# EAGLE board sensor LF (tugas nanang) (EAGLE 7.5.0)
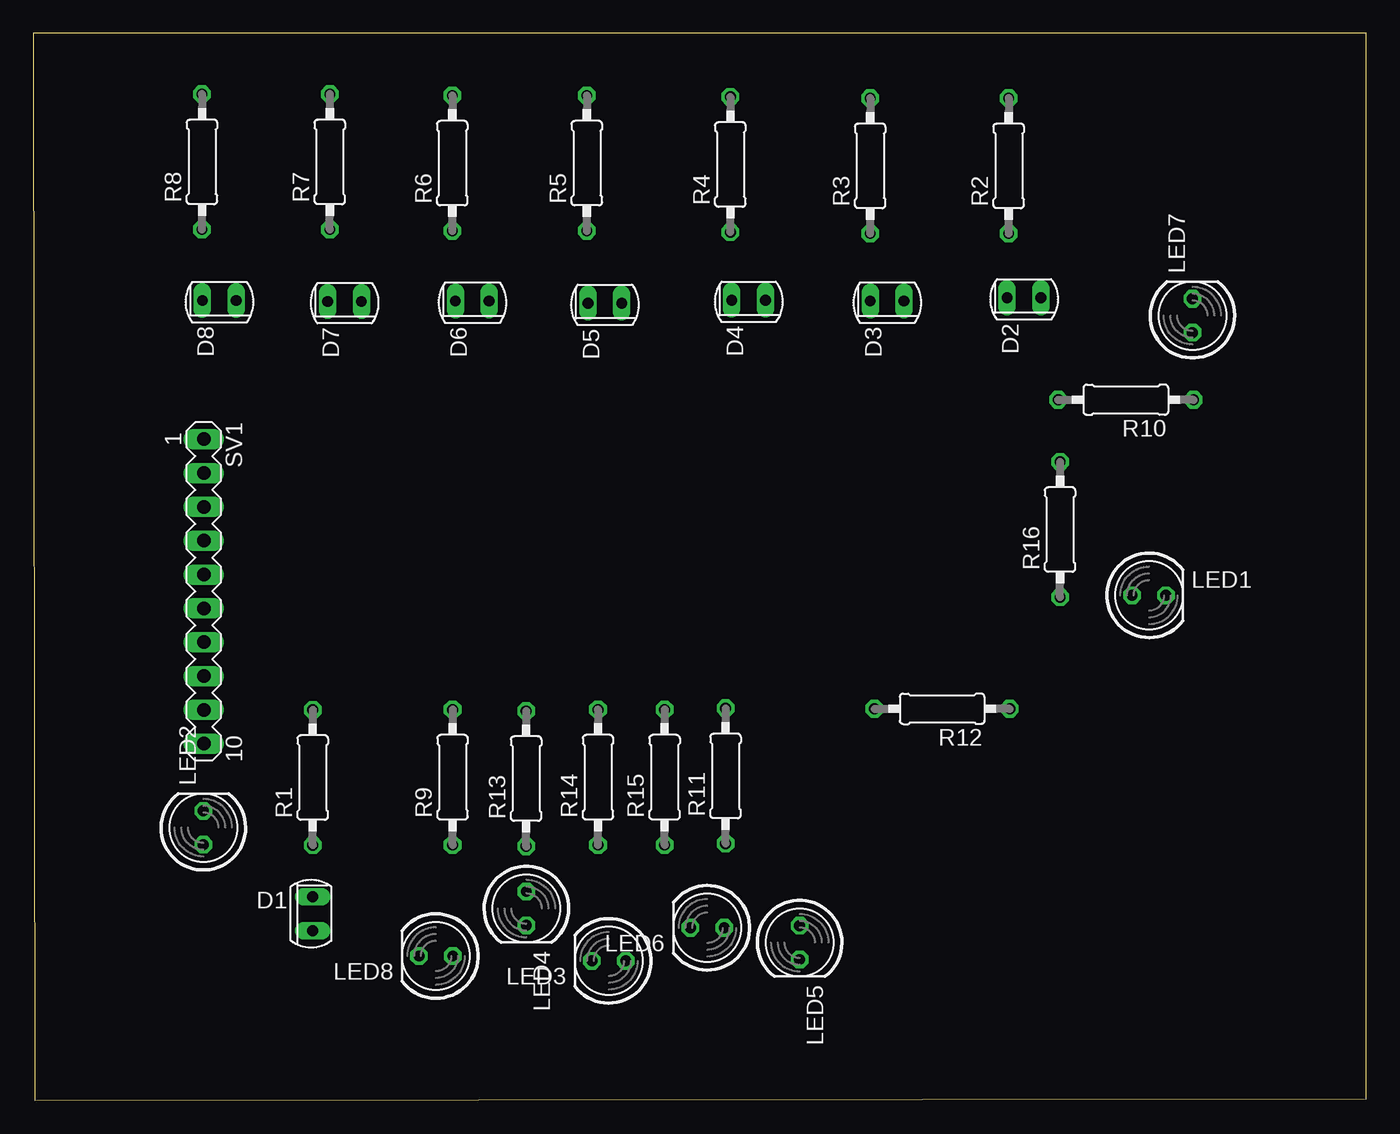
[diagram p0: board, top side]
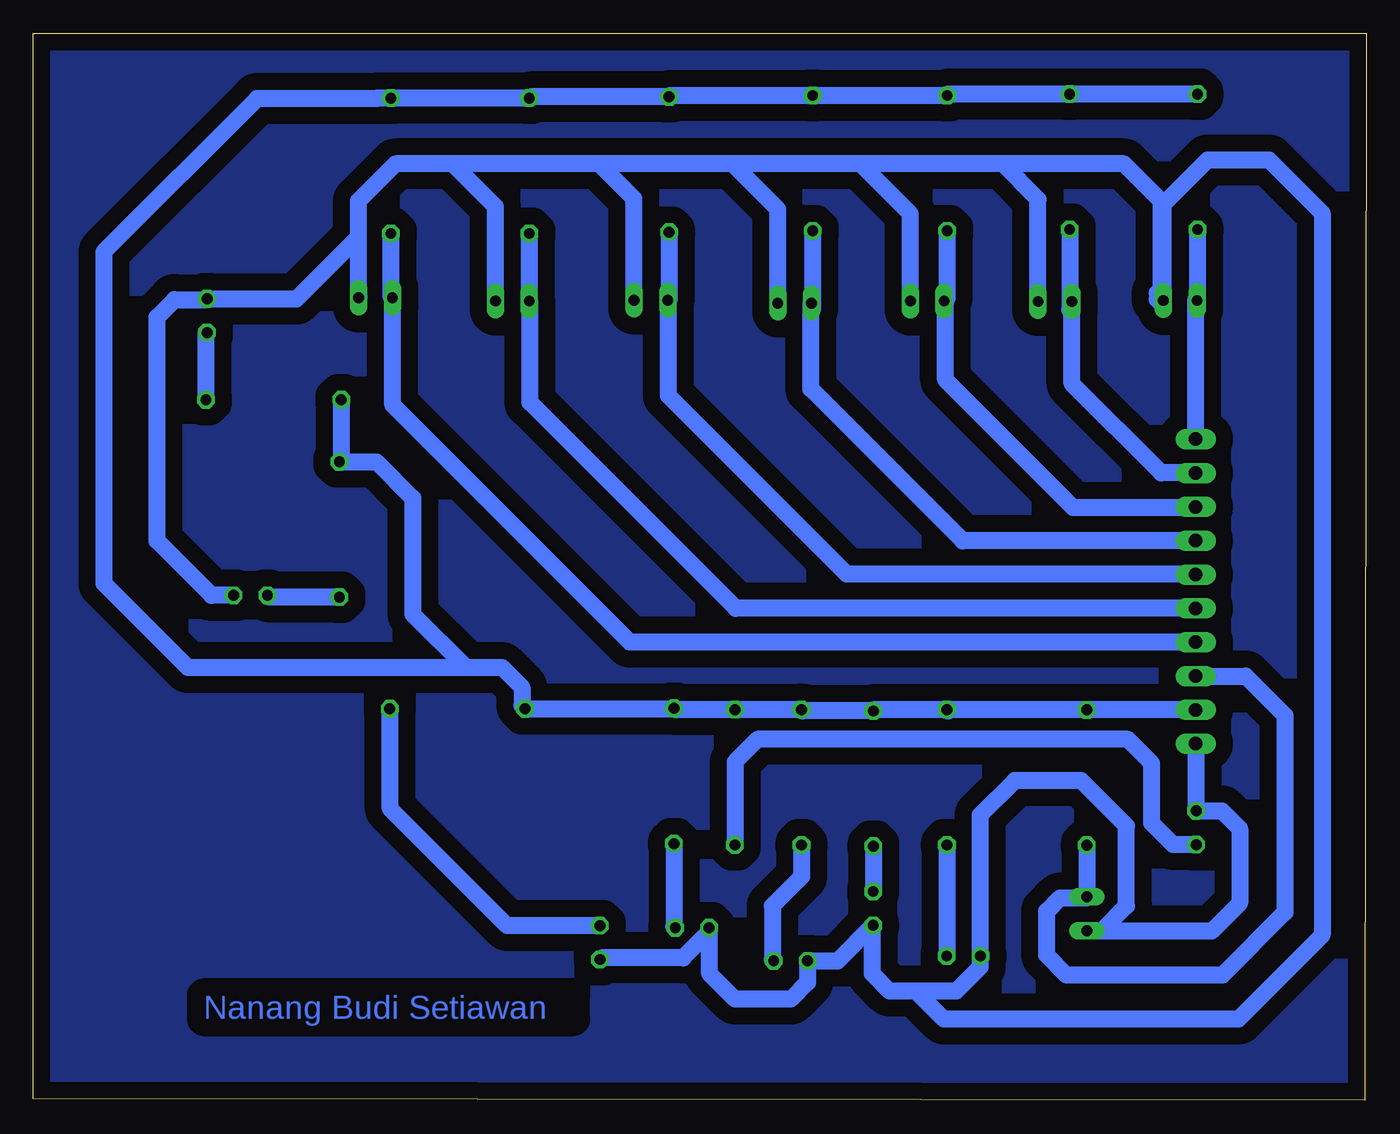
[diagram p1: board, bottom side, seen from below]

Size 100.1 x 80.1 mm. Coordinates in mm from the lower left corner, seen from the top.
Outline: 0.1,0 100.1,0.1 100.1,80.1 0,80.1 0.1,0
Copper layers (1*16): Top 0.035mm / dielectric 1.5mm / Bottom 0.035mm
Design rules "default": minimum track width 10mil, minimum drill 24mil, track to track 8mil, track to pad 8mil, pad to pad 8mil, via to via 8mil, smd to smd 8mil, copper to edge 40mil, drill to drill 8mil, minimum pad ring 10mil, minimum via ring 8mil, stop-mask expansion 4mil, vias tented up to drill 0mil, thermal gap 10mil

## Footprints (pad centres in the part's own frame; a part is rotated, then mirrored left to right if it is on the bottom)
SFH225 = drill 0.813 long: A 0,1.27; K 0,-1.27
LED5MM = drill 0.813 octagon: A -1.27,0; K 1.27,0
0207/10 = drill 0.813 octagon: 1 -5.08,0; 2 5.08,0
MA10-1 = drill 1.016 long: 1 -11.43,0; 2 -8.89,0; 3 -6.35,0; 4 -3.81,0; 5 -1.27,0; 6 1.27,0; 7 3.81,0; 8 6.35,0; 9 8.89,0; 10 11.43,0

## Placement (x,y rotation side)
D1  PhotoDioda  [SFH225]  20.98,14 180 top
D2  PhotoDioda  [SFH225]  74.4,60.25 270 top
D3  PhotoDioda  [SFH225]  64.12,60 270 top
D4  PhotoDioda  [SFH225]  53.72,60.07 270 top
D5  PhotoDioda  [SFH225]  42.92,59.84 270 top
D6  PhotoDioda  [SFH225]  32.97,60 270 top
D7  PhotoDioda  [SFH225]  23.37,59.97 270 top
D8  PhotoDioda  [SFH225]  13.97,60.04 270 top
LED1  LED putih SB  [LED5MM]  83.79,37.91 0 top
LED2  LED putih SB  [LED5MM]  12.77,20.46 90 top
LED3  LED putih SB  [LED5MM]  43.22,10.47 180 top
LED4  LED putih SB  [LED5MM]  37.03,14.4 270 top
LED5  LED putih SB  [LED5MM]  57.55,11.84 270 top
LED6  LED putih SB  [LED5MM]  50.62,12.95 180 top
LED7  LED putih SB  [LED5MM]  87.05,58.9 90 top
LED8  LED putih SB  [LED5MM]  30.24,10.83 180 top
R1  [0207/10]  20.99,24.23 90 top
R2  [0207/10]  73.25,70.15 90 top
R3  [0207/10]  62.85,70.15 90 top
R4  [0207/10]  52.35,70.25 90 top
R5  [0207/10]  41.57,70.35 90 top
R6  [0207/10]  31.47,70.35 90 top
R7  [0207/10]  22.27,70.45 90 top
R8  [0207/10]  12.67,70.45 90 top
R9  330  [0207/10]  31.49,24.25 90 top
R10  330  [0207/10]  82.05,52.59 180 top
R11  330  [0207/10]  51.99,24.35 90 top
R12  330  [0207/10]  68.25,29.39 180 top
R13  330  [0207/10]  37.01,24.15 90 top
R14  330  [0207/10]  42.41,24.25 90 top
R15  330  [0207/10]  47.41,24.25 90 top
R16  330  [0207/10]  77.11,42.85 90 top
SV1  [MA10-1]  12.8,38.2 270 top

## Library data of the parts
D1-D8 = opto-trans-siemens
LED1-LED8 = led
R1-R16 = resistor
SV1 = con-lstb

## Nets
GND: D1.A D2.A D3.A D4.A D5.A D6.A D7.A D8.A LED1.K LED2.K LED3.K LED4.K LED5.K LED6.K LED7.K LED8.K SV1.10
N$1: LED7.A R10.1
N$2: D7.K R7.1 SV1.2
N$3: D8.K R8.1 SV1.1
N$4: D1.K R1.1 SV1.8
N$5: D2.K R2.1 SV1.7
N$6: D3.K R3.1 SV1.6
N$7: D5.K R5.1 SV1.4
N$8: D4.K R4.1 SV1.5
N$9: D6.K R6.1 SV1.3
N$10: LED6.A R11.1
N$11: LED5.A R12.1
N$12: LED4.A R13.1
N$13: LED3.A R14.1
N$14: LED2.A R15.1
N$15: LED1.A R16.1
N$16: LED8.A R9.1
VCC: R1.2 R2.2 R3.2 R4.2 R5.2 R6.2 R7.2 R8.2 R9.2 R10.2 R11.2 R12.2 R13.2 R14.2 R15.2 R16.2 SV1.9

## Tracks (layer width: path | path; a pad name or v marks a point on that pad's centre or on a via)
GND
  Bottom 1.27: SV1.10 12.77,26.74 LED2.K 10.83,21.73 9.5,20.4 9.5,14.8 11.6,12.7 20.95,12.7 D1.A 19.87,12.73 18,14.6 18,20.6 21.4,24 26.4,24 29,21.4 29,10.86 | 29,10.86 LED8.K | 29,10.86 29,10 30.8,8.2 33.8,8.2 | 33.8,8.2 35.8,8.2 37.1,9.5 37.1,13.06 LED4.K 39.69,10.47 LED3.K 41.95,8.85 43.2,7.6 47.4,7.6 49.3,9.5 49.3,12.9 LED6.K 49.35,12.65 51.3,10.7 57.42,10.7 LED5.K | 75.6,60.32 D2.A 75.7,60.28 75.7,64.8 | 27.3,70.3 18.2,70.3 15.24,67.34 D8.A 15.24,60.14 15.7,60.6 15.7,60.1 15.4,59.8 15.4,67.1 11.9,70.6 7.3,70.6 3.3,66.6 3.3,12.4 9.6,6.1 31.7,6.1 33.8,8.2 | 27.3,70.3 38,70.3 | 38,70.3 47.6,70.3 | 47.6,70.3 57.6,70.3 | 57.6,70.3 68.6,70.3 | 68.6,70.3 72.9,70.3 75.7,67.5 75.7,64.8 | D3.A 65.39,67.09 68.6,70.3 | D4.A 54.99,67.69 57.6,70.3 | D5.A 44.19,66.89 47.6,70.3 | D6.A 34.24,66.54 38,70.3 | D7.A 24.64,67.64 27.3,70.3 | 75.7,64.8 80.33,60.17 LED7.K 87.12,60.1 89.5,60.1 90.8,58.8 90.8,42 86.71,37.91 LED1.K
N$1
  Bottom 1.27: R10.1 87.13,57.55 LED7.A
N$2
  Bottom 1.27: 12.71,47 SV1.2 15.4,47.1 22.1,53.8 22.1,59.2 | 22.1,59.2 D7.K | R7.1 22.27,59.37 22.1,59.2
N$3
  Bottom 1.27: 12.74,49.57 SV1.1 12.8,60.04 D8.K 12.67,60.07 R8.1
N$4
  Bottom 1.27: R1.1 D1.K 21.05,15.2 23,15.2 24,14.2 24,10.9 22.5,9.4 10.8,9.4 6.1,14.1 6.1,28.9 9.05,31.85 SV1.8
N$5
  Bottom 1.27: SV1.7 55.29,34.39 73.1,52.2 73.1,60.22 D2.K 73.25,60.37 R2.1
N$6
  Bottom 1.27: SV1.6 47.33,36.93 62.8,52.4 62.8,59.95 D3.K R3.1
N$7
  Bottom 1.27: SV1.4 30.3,42 41.7,53.4 41.7,59.3 | 41.7,59.3 41.7,59.79 D5.K | R5.1 41.57,59.43 41.7,59.3
N$8
  Bottom 1.27: SV1.5 12.83,39.5 39,39.5 52.4,52.9 52.4,60.02 D4.K 52.35,60.17 R4.1
N$9
  Bottom 1.27: 12.75,44.5 SV1.3 12.85,44.5 22,44.5 31.6,54.1 31.6,59.9 D6.K 31.47,60.23 R6.1
N$10
  Bottom 1.27: R11.1 51.99,13.05 LED6.A
N$11
  Bottom 1.27: LED5.A 64.51,13.11 73.3,21.9 73.3,29.36 R12.1
N$12
  Bottom 1.27: R13.1 37.01,15.69 LED4.A
N$13
  Bottom 1.27: R14.1 42.41,16.79 44.6,14.6 44.6,10.58 LED3.A
N$14
  Bottom 1.27: LED2.A 14.49,19.19 16.1,20.8 16.1,25.3 17.9,27.1 45.7,27.1 47.4,25.4 R15.1
N$15
  Bottom 1.27: R16.1 82.38,37.77 LED1.A
N$16
  Bottom 1.27: R9.1 31.49,10.85 LED8.A
N$17
  pour Bottom (isolate 1.27): 0.1,80.1 100.1,80.1 100.1,0.1 0.1,0.1
VCC
  Bottom 1.27: SV1.9 R1.2 31.47,29.31 R9.2 | 31.39,29.23 R9.2 | R9.2 36.91,29.33 R13.2 42.31,29.23 R14.2 | R14.2 R15.2 51.89,29.33 R11.2 52.03,29.39 R12.2 63.4,29.62 63.4,31 64.9,32.5 67.6,32.5 | 42.47,29.39 R14.2 | R8.2 R7.2 31.37,75.53 R6.2 R5.2 52.25,75.43 R4.2 62.75,75.33 R3.2 R2.2 74.27,75.23 74.3,75.2 83.3,75.2 94.8,63.7 94.8,38.8 88.5,32.5 67.6,32.5 | R10.2 76.97,48.07 R16.2 74.33,47.93 71.6,45.2 71.6,36.5 67.6,32.5

## Text on the board
Bottom: Nanang Budi Setiawan